# Altium PCB MiniMax 4bit.pcbdoc (part 1 of 3)
Units mil, origin at the board's own origin, x right, y up, seen from the top; angles counter-clockwise.
Board outline 6151.56 x 5816.92 mil, 2 copper layers (Top Layer, Bottom Layer); 181 components, 187 nets, 727 pads, 463 vias.
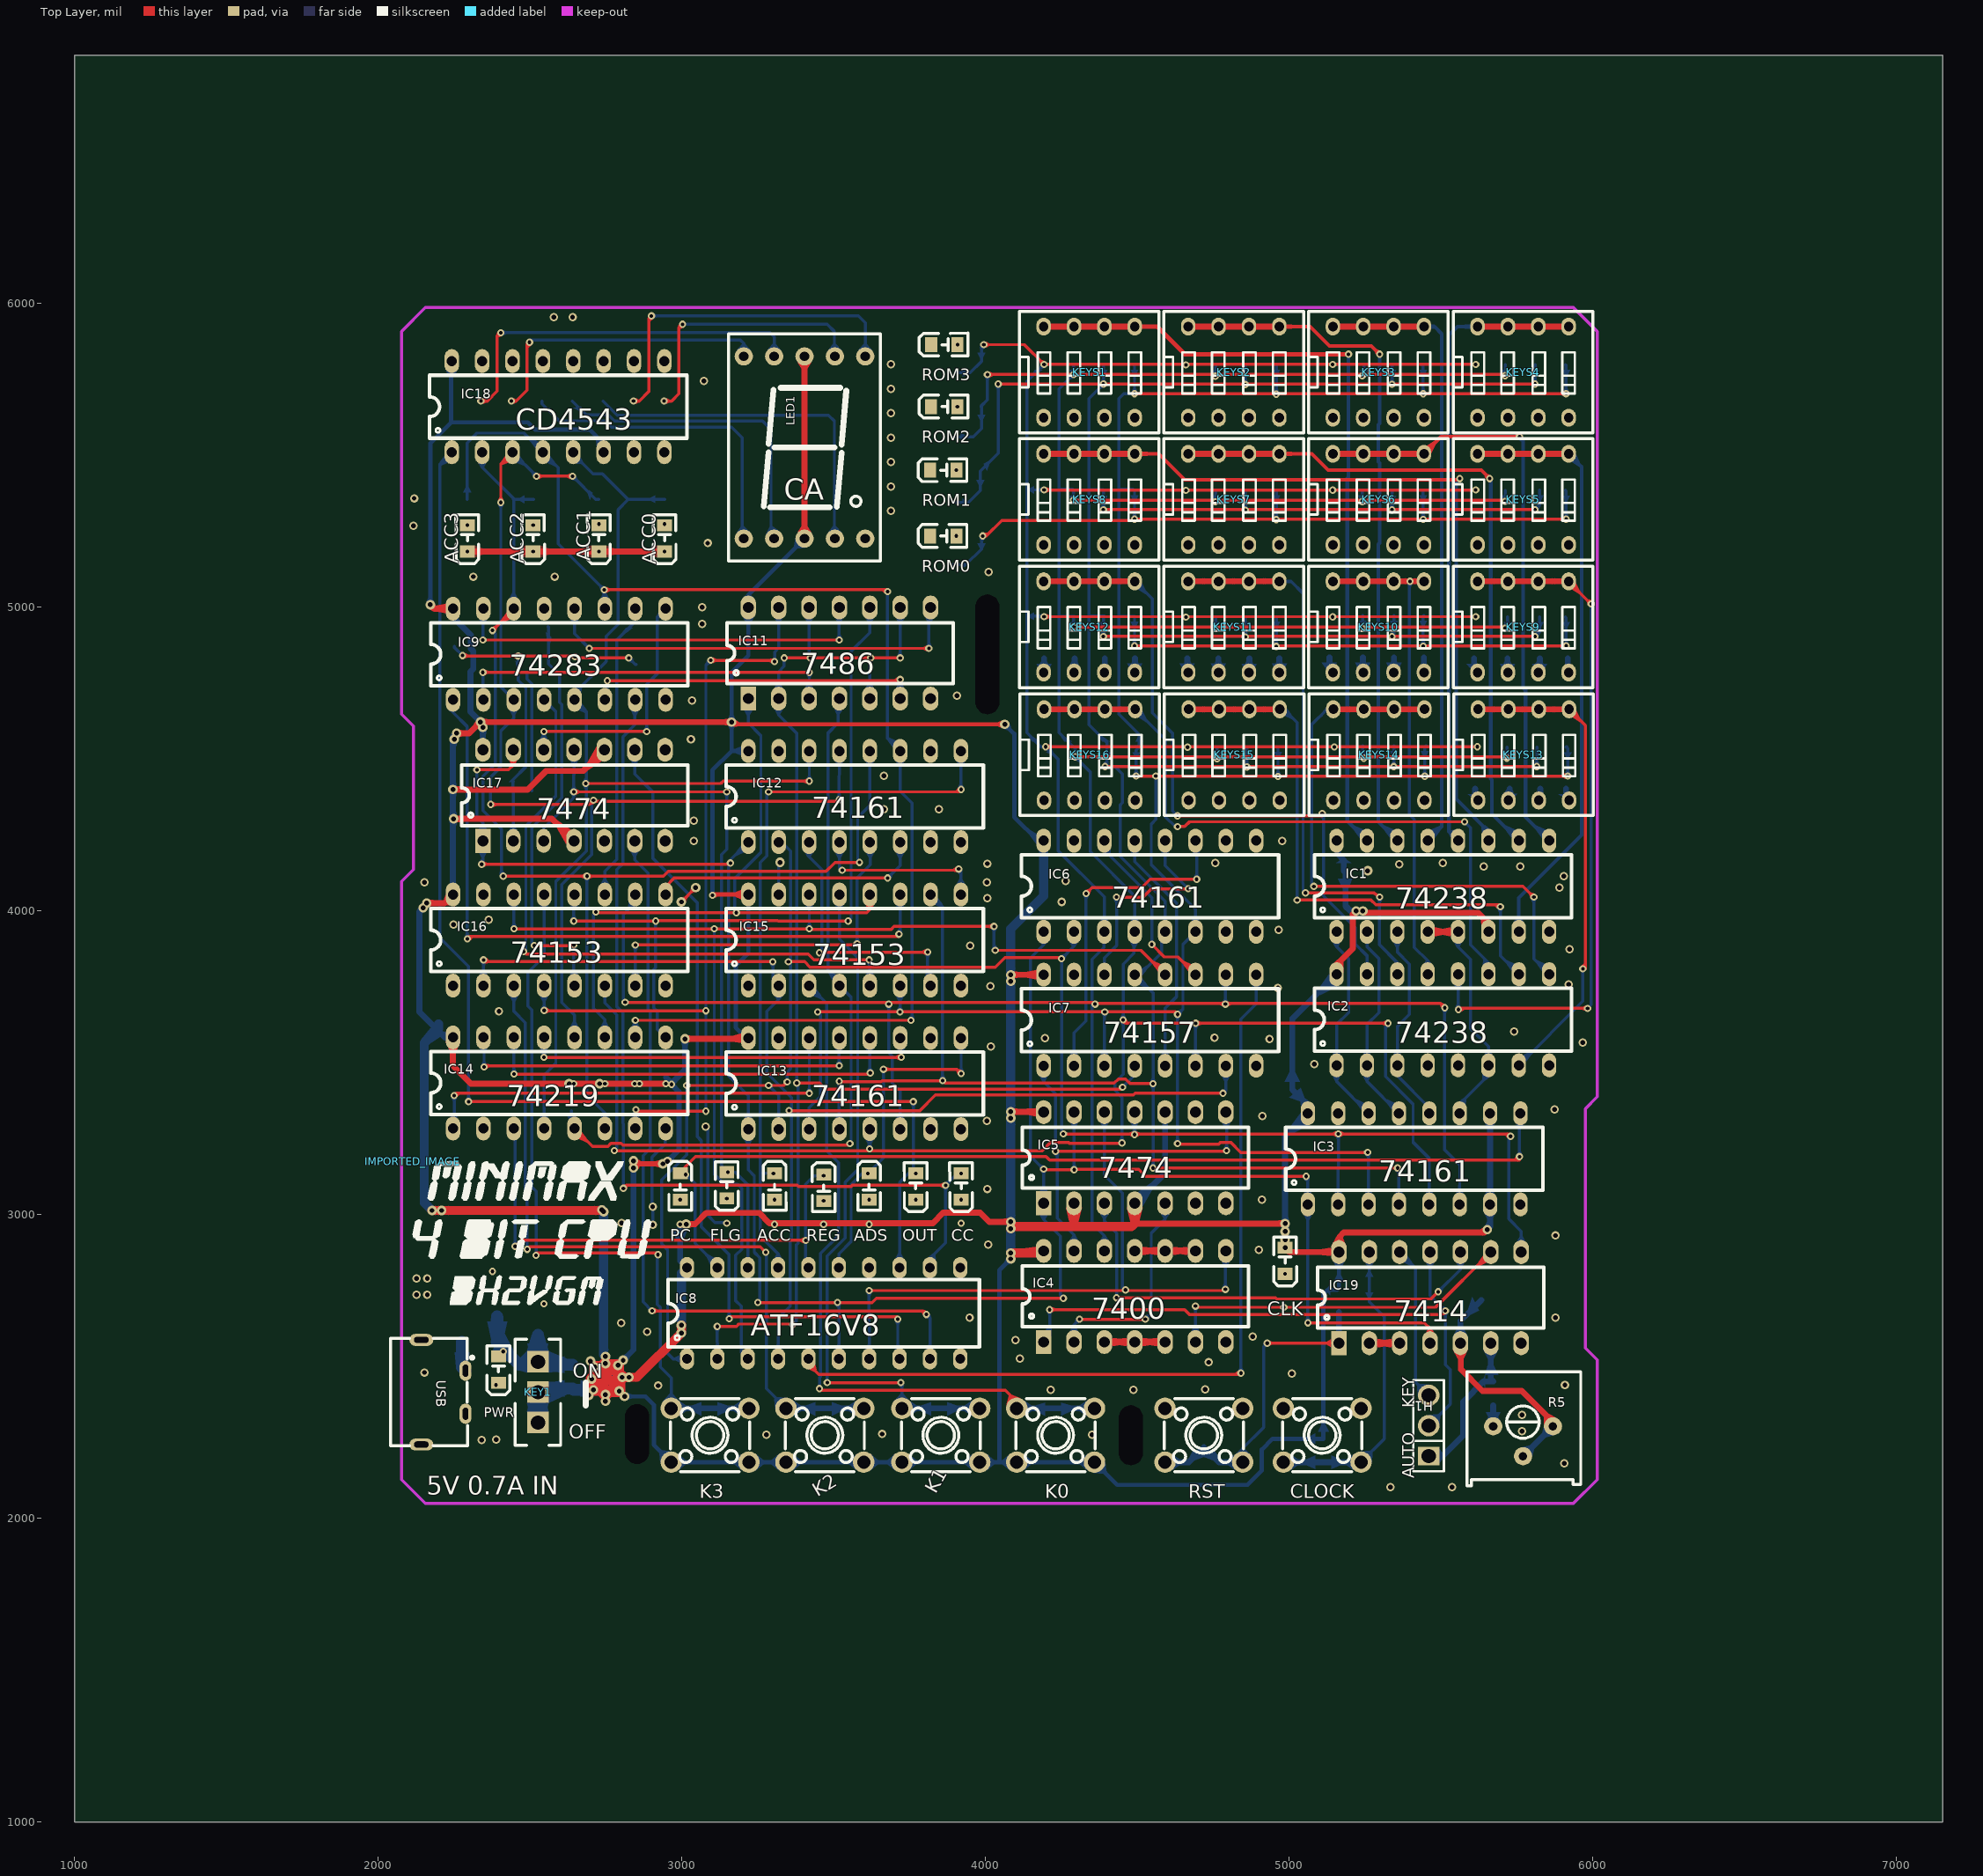
[diagram p0: Top Layer view]
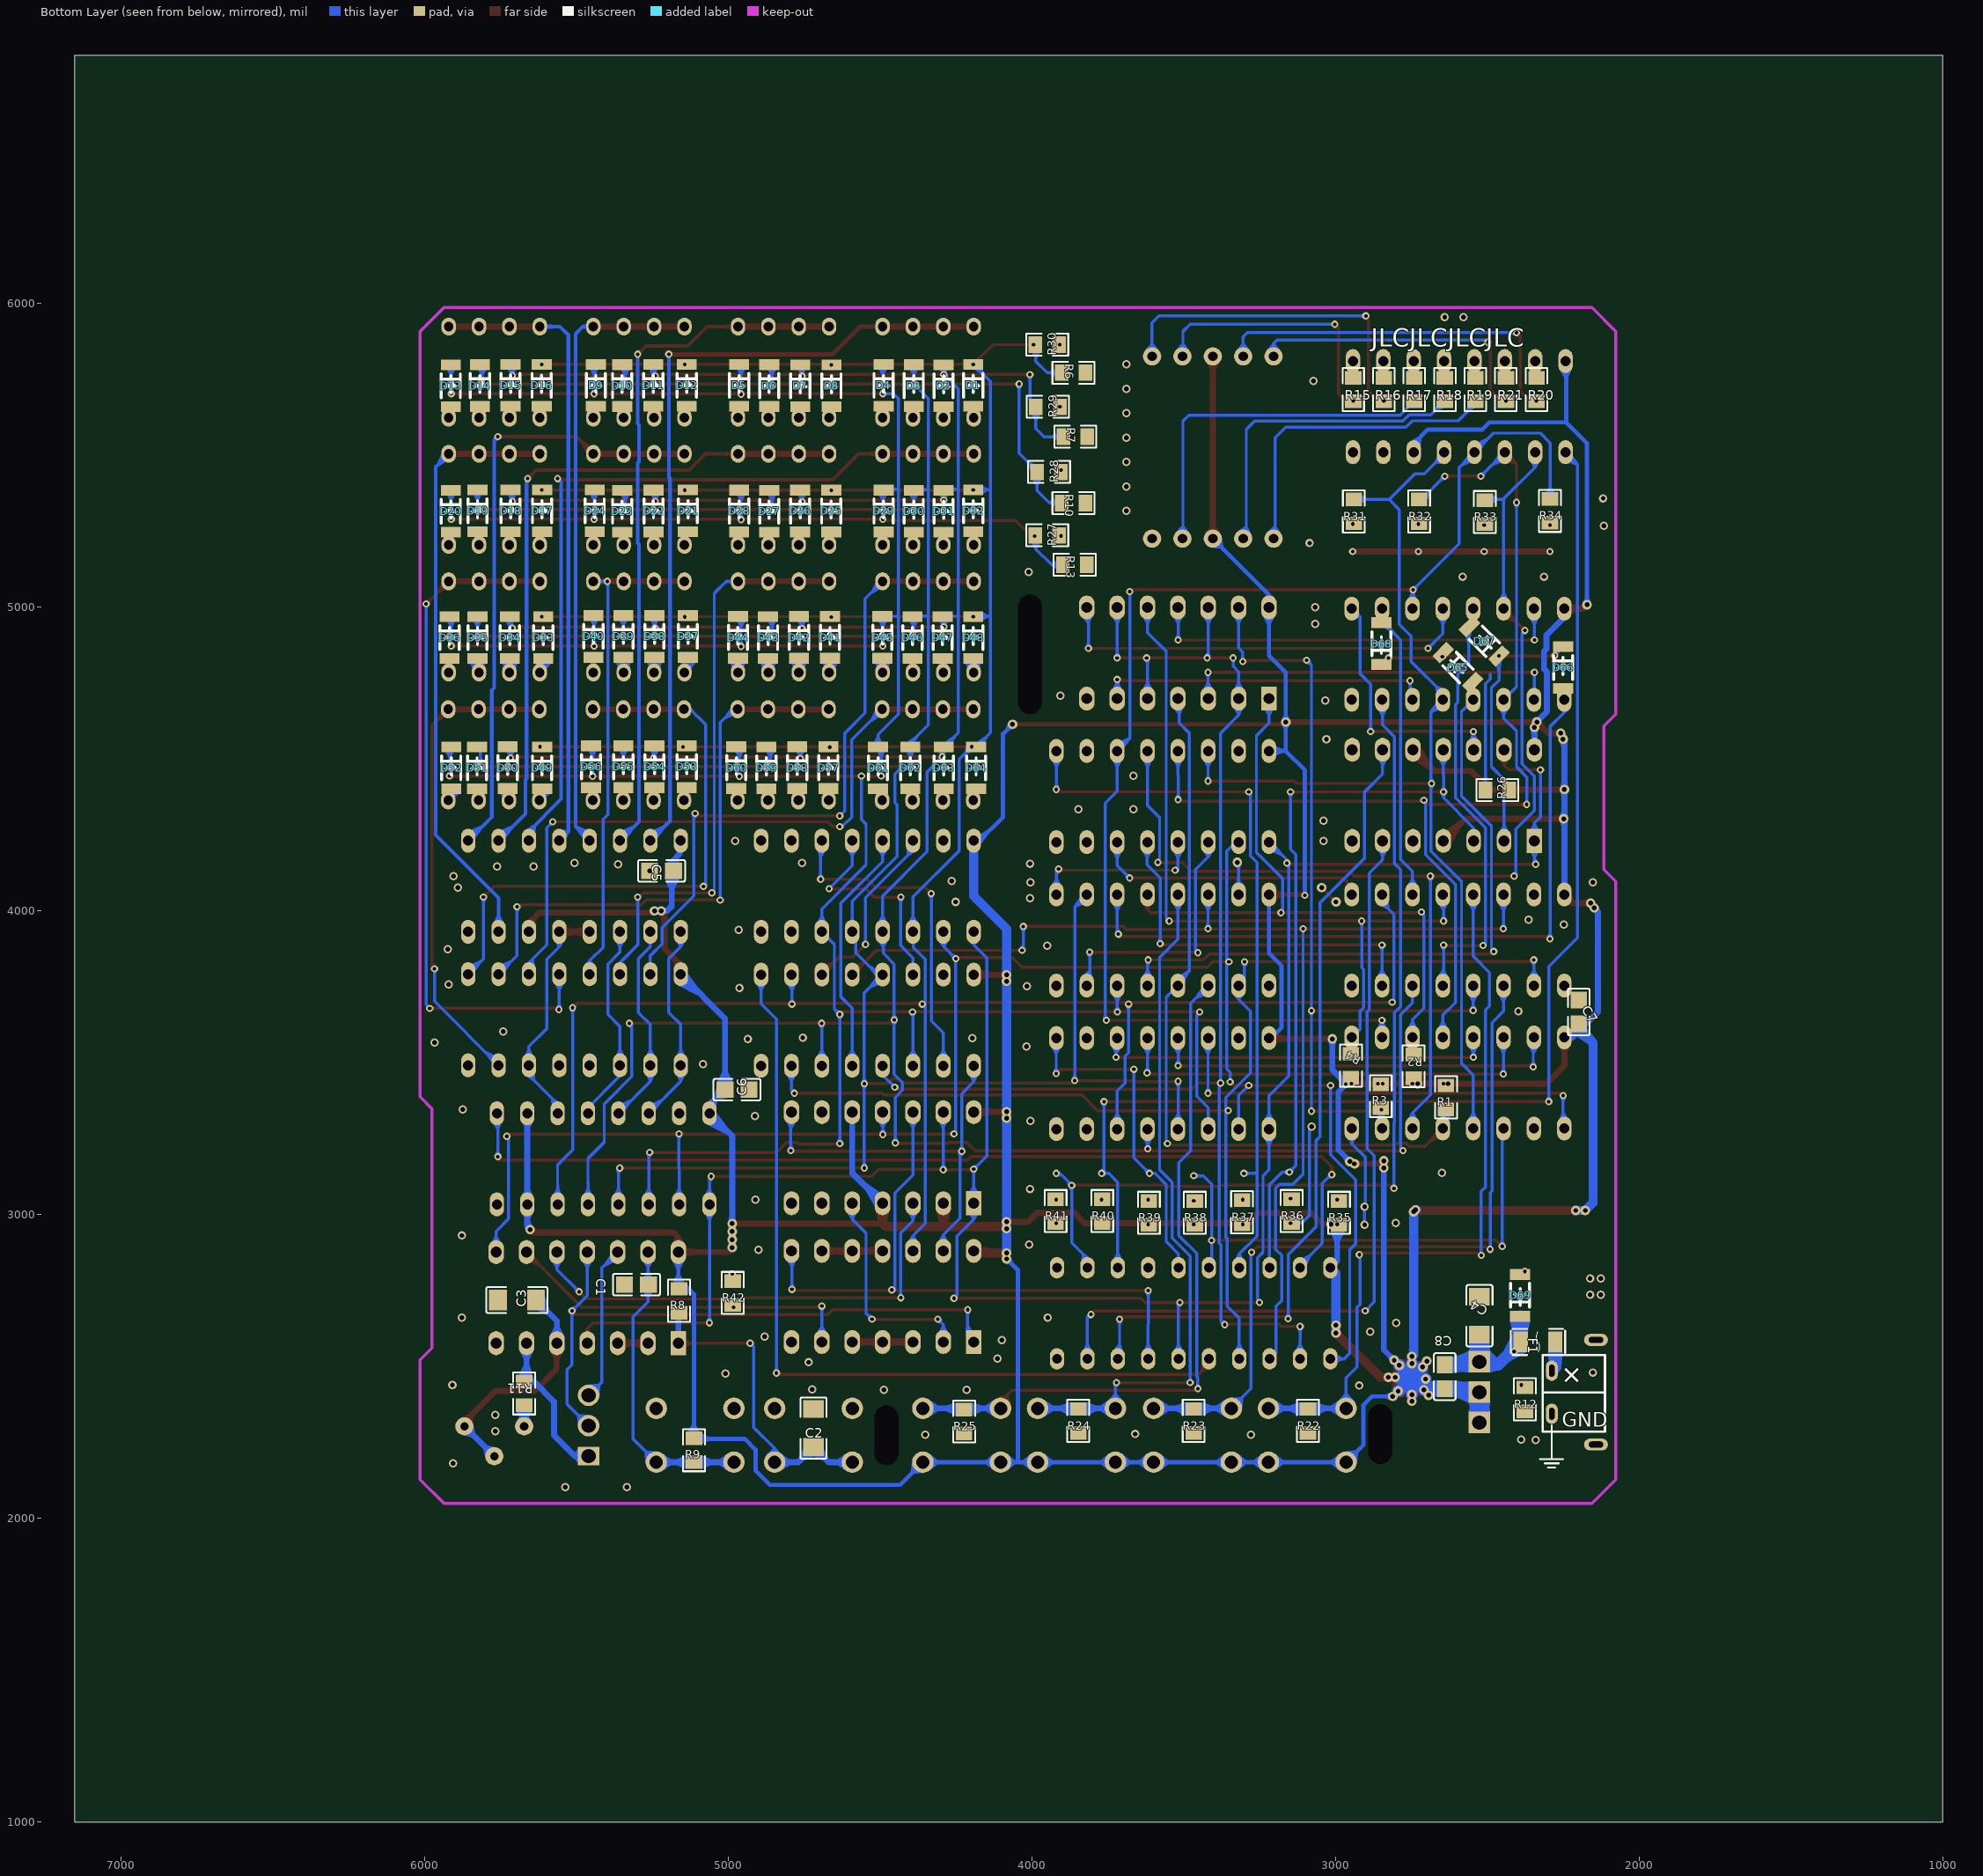
[diagram p1: Bottom Layer view, seen from below]

## Layer stack, top to bottom
Top Layer: signal copper (thickness not stored)
Dielectric: dielectric 12.6, FR-4, Dk 4.8
Bottom Layer: signal copper (thickness not stored)

## Board outline
7151.56,1000 1000,1000 1000,6816.92 7151.56,6816.92
cut-out: 4045.27,5001.96 4045.27,4687 cw(c4005.9,4687) 3966.53,4687 3966.53,5001.96 cw(c4005.9,5001.96) 4045.27,5001.96
cut-out: 4517.71,2332.68 4517.71,2214.57 cw(c4478.34,2214.57) 4438.97,2214.57 4438.97,2332.68 cw(c4478.34,2332.68) 4517.71,2332.68
cut-out: 2891.73,2336.61 2891.73,2218.5 cw(c2852.36,2218.5) 2812.99,2218.5 2812.99,2336.61 cw(c2852.36,2336.61) 2891.73,2336.61

## Components (designator, comment, footprint, x,y, rotation, side; value= is the part's Value field where it differs from the comment)
ACC "ROM0" LED0805-RD 3305.11,3092.52 r270 top
ACC0 "ROM0" LED0805-RD 2942.91,5226.37 r90 top
ACC1 "ROM0" LED0805-RD 2726.38,5226.37 r90 top
ACC2 "ROM0" LED0805-RD 2509.84,5226.37 r90 top
ACC3 "ROM0" LED0805-RD 2293.3,5226.37 r90 top
ADS "ROM0" LED0805-RD 3616.14,3092.52 r270 top
C1 "104" C0805 5301.17,2769.68 r180 bottom
C2 "10uF" C1206 4718.5,2297.24 r90 bottom
C3 "10uF" C1206 5694.87,2718.5 r0 bottom
C4 "10uF" C1206 2525.59,2667.32 r270 bottom
C5 "104" C0805 5218.5,4131.89 r180 bottom
C6 "104" C0805 4970.47,3411.41 r0 bottom
C7 "104" C0805 2198.82,3667.32 r270 bottom
C8 "104" C0805 2639.76,2466.53 r270 bottom
CC "ROM0" LED0805-RD 3919.29,3092.52 r90 top
CLK "CLK" LED0805-RD 4986.2,2848.41 r90 top
CLOCK "K4-6×6_TH" KEY-TH_4P-L6.0-W6.0-P4.50-LS6.5 5108.26,2273.62 r0 top
D1 "LL4148SG" LL-34_L3.5-W1.5-LS3.5-FD 4192.39,5730.28 r270 bottom
D2 "LL4148SG" LL-34_L3.5-W1.5-LS3.5-FD 4290.03,5728.88 r270 bottom
D3 "LL4148SG" LL-34_L3.5-W1.5-LS3.5-FD 4388.34,5729.21 r270 bottom
D4 "LL4148SG" LL-34_L3.5-W1.5-LS3.5-FD 4487.67,5729.73 r270 bottom
D5 "LL4148SG" LL-34_L3.5-W1.5-LS3.5-FD 4963.3,5729.73 r270 bottom
D6 "LL4148SG" LL-34_L3.5-W1.5-LS3.5-FD 4864.18,5729.21 r270 bottom
D7 "LL4148SG" LL-34_L3.5-W1.5-LS3.5-FD 4761.73,5728.72 r270 bottom
D8 "LL4148SG" LL-34_L3.5-W1.5-LS3.5-FD 4659.36,5728.72 r270 bottom
D9 "LL4148SG" LL-34_L3.5-W1.5-LS3.5-FD 5435.03,5730.31 r270 bottom
D10 "LL4148SG" LL-34_L3.5-W1.5-LS3.5-FD 5348.43,5729.21 r270 bottom
D11 "LL4148SG" LL-34_L3.5-W1.5-LS3.5-FD 5246.06,5730.31 r270 bottom
D12 "LL4148SG" LL-34_L3.5-W1.5-LS3.5-FD 5135.82,5730.31 r270 bottom
D13 "LL4148SG" LL-34_L3.5-W1.5-LS3.5-FD 5912.86,5728.88 r270 bottom
D14 "LL4148SG" LL-34_L3.5-W1.5-LS3.5-FD 5816.93,5729.21 r270 bottom
D15 "LL4148SG" LL-34_L3.5-W1.5-LS3.5-FD 5716.01,5730.28 r270 bottom
D16 "LL4148SG" LL-34_L3.5-W1.5-LS3.5-FD 5613.65,5730.28 r270 bottom
D17 "LL4148SG" LL-34_L3.5-W1.5-LS3.5-FD 5612.2,5316.92 r270 bottom
D18 "LL4148SG" LL-34_L3.5-W1.5-LS3.5-FD 5716.01,5316.9 r270 bottom
D19 "LL4148SG" LL-34_L3.5-W1.5-LS3.5-FD 5824.79,5316.92 r270 bottom
D20 "LL4148SG" LL-34_L3.5-W1.5-LS3.5-FD 5912.86,5315.49 r270 bottom
D21 "LL4148SG" LL-34_L3.5-W1.5-LS3.5-FD 5131.88,5316.92 r270 bottom
D22 "LL4148SG" LL-34_L3.5-W1.5-LS3.5-FD 5245.17,5316.34 r270 bottom
D23 "LL4148SG" LL-34_L3.5-W1.5-LS3.5-FD 5348.43,5315.82 r270 bottom
D24 "LL4148SG" LL-34_L3.5-W1.5-LS3.5-FD 5438.97,5316.92 r270 bottom
D25 "LL4148SG" LL-34_L3.5-W1.5-LS3.5-FD 4660.15,5316.34 r270 bottom
D26 "LL4148SG" LL-34_L3.5-W1.5-LS3.5-FD 4762.51,5316.34 r270 bottom
D27 "LL4148SG" LL-34_L3.5-W1.5-LS3.5-FD 4864.18,5315.82 r270 bottom
D28 "LL4148SG" LL-34_L3.5-W1.5-LS3.5-FD 4963.3,5316.34 r270 bottom
D29 "LL4148SG" LL-34_L3.5-W1.5-LS3.5-FD 4487.67,5316.34 r270 bottom
D30 "LL4148SG" LL-34_L3.5-W1.5-LS3.5-FD 4388.34,5315.82 r270 bottom
D31 "LL4148SG" LL-34_L3.5-W1.5-LS3.5-FD 4290.03,5315.49 r270 bottom
D32 "LL4148SG" LL-34_L3.5-W1.5-LS3.5-FD 4192.39,5316.9 r270 bottom
D33 "LL4148SG" LL-34_L3.5-W1.5-LS3.5-FD 5608.26,4899.6 r270 bottom
D34 "LL4148SG" LL-34_L3.5-W1.5-LS3.5-FD 5718.49,4899.6 r270 bottom
D35 "LL4148SG" LL-34_L3.5-W1.5-LS3.5-FD 5824.79,4899.6 r270 bottom
D36 "LL4148SG" LL-34_L3.5-W1.5-LS3.5-FD 5916.8,4899.57 r270 bottom
D37 "LL4148SG" LL-34_L3.5-W1.5-LS3.5-FD 5131.88,4903.54 r270 bottom
D38 "LL4148SG" LL-34_L3.5-W1.5-LS3.5-FD 5242.12,4903.54 r270 bottom
D39 "LL4148SG" LL-34_L3.5-W1.5-LS3.5-FD 5344.48,4903.54 r270 bottom
D40 "LL4148SG" LL-34_L3.5-W1.5-LS3.5-FD 5442.9,4903.54 r270 bottom
D41 "LL4148SG" LL-34_L3.5-W1.5-LS3.5-FD 4664.08,4900.42 r270 bottom
D42 "LL4148SG" LL-34_L3.5-W1.5-LS3.5-FD 4766.45,4900.42 r270 bottom
D43 "LL4148SG" LL-34_L3.5-W1.5-LS3.5-FD 4868.11,4899.9 r270 bottom
D44 "LL4148SG" LL-34_L3.5-W1.5-LS3.5-FD 4967.23,4900.42 r270 bottom
D45 "LL4148SG" LL-34_L3.5-W1.5-LS3.5-FD 4491.6,4900.42 r270 bottom
D46 "LL4148SG" LL-34_L3.5-W1.5-LS3.5-FD 4392.27,4899.9 r270 bottom
D47 "LL4148SG" LL-34_L3.5-W1.5-LS3.5-FD 4293.3,4899.6 r270 bottom
D48 "LL4148SG" LL-34_L3.5-W1.5-LS3.5-FD 4192.39,4899.57 r270 bottom
D49 "LL4148SG" LL-34_L3.5-W1.5-LS3.5-FD 5612.2,4470.47 r270 bottom
D50 "LL4148SG" LL-34_L3.5-W1.5-LS3.5-FD 5725.34,4471.42 r270 bottom
D51 "LL4148SG" LL-34_L3.5-W1.5-LS3.5-FD 5826.26,4470.9 r270 bottom
D52 "LL4148SG" LL-34_L3.5-W1.5-LS3.5-FD 5911.41,4470.47 r270 bottom
D53 "LL4148SG" LL-34_L3.5-W1.5-LS3.5-FD 5135.82,4474.4 r270 bottom
D54 "LL4148SG" LL-34_L3.5-W1.5-LS3.5-FD 5242.12,4474.4 r270 bottom
D55 "LL4148SG" LL-34_L3.5-W1.5-LS3.5-FD 5344.48,4474.4 r270 bottom
D56 "LL4148SG" LL-34_L3.5-W1.5-LS3.5-FD 5450.78,4474.4 r270 bottom
D57 "LL4148SG" LL-34_L3.5-W1.5-LS3.5-FD 4669.47,4471.42 r270 bottom
D58 "LL4148SG" LL-34_L3.5-W1.5-LS3.5-FD 4771.84,4471.42 r270 bottom
D59 "LL4148SG" LL-34_L3.5-W1.5-LS3.5-FD 4873.5,4470.9 r270 bottom
D60 "LL4148SG" LL-34_L3.5-W1.5-LS3.5-FD 4972.62,4471.42 r270 bottom
D61 "LL4148SG" LL-34_L3.5-W1.5-LS3.5-FD 4505.9,4470.47 r270 bottom
D62 "LL4148SG" LL-34_L3.5-W1.5-LS3.5-FD 4399.6,4470.47 r270 bottom
D63 "LL4148SG" LL-34_L3.5-W1.5-LS3.5-FD 4289.36,4470.47 r270 bottom
D64 "LL4148SG" LL-34_L3.5-W1.5-LS3.5-FD 4183.06,4470.47 r270 bottom
D65 "LL4148SG" LL-34_L3.5-W1.5-LS3.5-FD 2596.45,4801.18 r225 bottom
D66 "LL4148SG" LL-34_L3.5-W1.5-LS3.5-FD 2250,4801.18 r270 bottom
D67 "LL4148SG" LL-34_L3.5-W1.5-LS3.5-FD 2509.84,4887.79 r45 bottom
D68 "LL4148SG" LL-34_L3.5-W1.5-LS3.5-FD 2848.42,4879.91 r90 bottom
D69 "LL4148SG" LL-34_L3.5-W1.5-LS3.5-FD 2391.73,2734.25 r90 bottom
F1 "0.5A" F1206 2332.68,2580.71 r180 bottom
FLG "ROM0" LED0805-RD 3147.63,3096.45 r90 top
H1 "排针V2_2.54_1X3" HDR-TH_3P-P2.54-V-M-1 5458.65,2305.12 r90 top
IC1 "74238/74LS238/74HC238" PDIP-16 5155.5,3931.1 r0 top
IC2 "74238/74LS238/74HC238" PDIP-16 5155.5,3491.28 r0 top
IC3 "74161/74LS161/74HC161" PDIP-16 5061.02,3033.46 r0 top
IC4 "7400/74LS00/74HC00" DIP-14N#1 4190.94,2580.71 r0 top
IC5 "7474/74LS74/74HC74" DIP-14N#1 4190.94,3037.4 r0 top
IC6 "74161/74LS161/74HC161" PDIP-16 4190.94,3931.1 r0 top
IC7 "74157/74LS157/74HC157" PDIP-16 4190.94,3490.15 r0 top
IC8 "ATF16V8B" PDIP-20 3466.53,2675.2 r0 top
IC9 "74283/74LS283/74HC283" PDIP-16 2246.06,4694.88 r0 top
IC11 "7486/74LS86/74HC86" DIP-14N#1 3218.5,4698.81 r0 top
IC12 "74161/74LS161/74HC161" PDIP-16 3218.5,4226.37 r0 top
IC13 "74161/74LS161/74HC161" PDIP-16 3218.5,3281.49 r0 top
IC14 "74LS219" PDIP-16 2246.06,3283.46 r0 top
IC15 "74153/74LS153/74HC153" PDIP-16 3218.5,3753.93 r0 top
IC16 "74153/74LS153/74HC153" PDIP-16 2246.06,3753.93 r0 top
IC17 "7474/74LS74/74HC74" DIP-14N#2 2344.49,4230.31 r0 top
IC18 "CD4543" PDIP-16 2242.12,5509.84 r0 top
IC19 "7414/74LS14/74HC14" DIP-14N#1 5163.38,2576.77 r0 top
IMPORTED_IMAGE "IMPORTED_IMAGE" IMPORTED_IMAGE 2112.42,3175.19 r0 top
K0 "K4-6×6_TH" KEY-TH_4P-L6.0-W6.0-P4.50-LS6.5 4230.31,2273.62 r0 top
K1 "K4-6×6_TH" KEY-TH_4P-L6.0-W6.0-P4.50-LS6.5 3852.36,2273.62 r0 top
K2 "K4-6×6_TH" KEY-TH_4P-L6.0-W6.0-P4.50-LS6.5 3470.47,2273.62 r0 top
K3 "K4-6×6_TH" KEY-TH_4P-L6.0-W6.0-P4.50-LS6.5 3092.52,2273.62 r0 top
KEY1 "拨动开关2.54*3直插" 拨动开关-2.54*3 2525.59,2415.35 r0 top
KEYS1 "2.54 插件4位拨码开关" "2.54 插件4位拨码开关" 4341.08,5773.61 r0 top
KEYS2 "2.54 插件4位拨码开关" "2.54 插件4位拨码开关" 4816.92,5773.61 r0 top
KEYS3 "2.54 插件4位拨码开关" "2.54 插件4位拨码开关" 5293.3,5773.61 r0 top
KEYS4 "2.54 插件4位拨码开关" "2.54 插件4位拨码开关" 5769.68,5773.61 r0 top
KEYS5 "2.54 插件4位拨码开关" "2.54 插件4位拨码开关" 5769.68,5354.73 r0 top
KEYS6 "2.54 插件4位拨码开关" "2.54 插件4位拨码开关" 5293.3,5354.73 r0 top
KEYS7 "2.54 插件4位拨码开关" "2.54 插件4位拨码开关" 4816.92,5354.73 r0 top
KEYS8 "2.54 插件4位拨码开关" "2.54 插件4位拨码开关" 4341.08,5354.73 r0 top
KEYS9 "2.54 插件4位拨码开关" "2.54 插件4位拨码开关" 5769.68,4934.87 r0 top
KEYS10 "2.54 插件4位拨码开关" "2.54 插件4位拨码开关" 5293.3,4934.87 r0 top
KEYS11 "2.54 插件4位拨码开关" "2.54 插件4位拨码开关" 4816.92,4934.87 r0 top
KEYS12 "2.54 插件4位拨码开关" "2.54 插件4位拨码开关" 4341.08,4934.87 r0 top
KEYS13 "2.54 插件4位拨码开关" "2.54 插件4位拨码开关" 5771.13,4513.75 r0 top
KEYS14 "2.54 插件4位拨码开关" "2.54 插件4位拨码开关" 5294.75,4513.75 r0 top
KEYS15 "2.54 插件4位拨码开关" "2.54 插件4位拨码开关" 4818.38,4513.75 r0 top
KEYS16 "2.54 插件4位拨码开关" "2.54 插件4位拨码开关" 4342.53,4513.75 r0 top
LED1 "SM420561N" LED-SEG-TH_10P-L12.7-W19.0-P2.54-S15.24-BL 3403.54,5525.58 r0 top
OUT "ROM0" LED0805-RD 3769.68,3092.52 r90 top
PC "ROM0" LED0805-RD 2994.09,3092.52 r270 top
PWR "PWR" LED0805-RD 2395.63,2490.16 r90 top
R1 "4.7K" R0805#1 2635.82,3385.82 r270 bottom
R2 "4.7K" R0805#1 2742.12,3488.19 r90 bottom
R3 "4.7K" R0805#1 2850.39,3389.76 r270 bottom
R4 "4.7K" R0805#1 2948.82,3490.15 r90 bottom
R5 "3386-100k" RES-ADJ-TH_3386P 5769.68,2253.94 r180 top
R6 "4.7K" R0805#1 3862.2,5771.65 r0 bottom
R7 "4.7K" R0805#1 3856.29,5561.02 r0 bottom
R8 "4.7K" R0805#1 5161.41,2716.53 r270 bottom
R9 "4.7K" R0805#1 5112.2,2224.41 r270 bottom
R10 "4.7K" R0805#1 3862.2,5342.51 r0 bottom
R11 "1kΩ" R0805#1 5671.25,2411.42 r270 bottom
R12 "4.7K" R0805#1 2375.98,2391.73 r270 bottom
R13 "4.7K" R0805#1 3858.26,5139.76 r0 bottom
R15 "4.7k" R0805#2 2941.08,5716.39 r90 bottom
R16 "4.7k" R0805#2 2840.55,5716.39 r90 bottom
R17 "4.7k" R0805#2 2740.03,5716.39 r90 bottom
R18 "4.7k" R0805#2 2639.51,5716.39 r90 bottom
R19 "4.7k" R0805#2 2538.98,5716.39 r90 bottom
R20 "4.7k" R0805#2 2337.93,5716.39 r90 bottom
R21 "4.7k" R0805#2 2438.46,5716.39 r90 bottom
R22 "4.7K" R0805#1 3090.55,2320.86 r270 bottom
R23 "4.7K" R0805#1 3466.53,2320.86 r270 bottom
R24 "4.7K" R0805#1 3846.45,2320.86 r270 bottom
R25 "4.7K" R0805#1 4222.44,2318.9 r270 bottom
R26 "4.7K" R0805#1 2466.53,4397.63 r180 bottom
R27 "4.7K" R0805#1 3948.81,5236.21 r180 bottom
R28 "4.7K" R0805#1 3942.91,5444.87 r180 bottom
R29 "4.7K" R0805#1 3946.84,5659.44 r180 bottom
R30 "4.7K" R0805#1 3948.81,5864.16 r180 bottom
R31 "4.7K" R0805#1 2938.97,5314.95 r270 bottom
R32 "4.7K" R0805#1 2724.41,5314.95 r270 bottom
R33 "4.7K" R0805#1 2507.87,5312.98 r270 bottom
R34 "4.7K" R0805#1 2293.3,5316.92 r270 bottom
R35 "4.7K" R0805#1 2988.19,3005.9 r270 bottom
R36 "4.7K" R0805#1 3143.7,3011.81 r270 bottom
R37 "4.7K" R0805#1 3307.08,3007.87 r270 bottom
R38 "4.7K" R0805#1 3462.59,3005.9 r270 bottom
R39 "4.7K" R0805#1 3614.17,3005.9 r270 bottom
R40 "4.7K" R0805#1 3767.71,3011.81 r270 bottom
R41 "4.7K" R0805#1 3921.26,3011.81 r270 bottom
R42 "4.7K" R0805#1 4984.24,2742.12 r270 bottom
REG "ROM0" LED0805-RD 3466.53,3088.58 r270 top
ROM0 "ROM0" LED0805-RD 3860.23,5234.24 r0 top
ROM1 "ROM0" LED0805-RD 3860.23,5450.78 r0 top
ROM2 "ROM0" LED0805-RD 3863.82,5660.26 r0 top
ROM3 "ROM0" LED0805-RD 3864.17,5864.16 r0 top
RST "K4-6×6_TH" KEY-TH_4P-L6.0-W6.0-P4.50-LS6.5 4718.5,2273.62 r0 top
USB "KH-TYPE-C-2P" USB-SMD_KH-TYPE-C-2P 2214.57,2415.35 r270 top

## Footprints (in the part's own frame and the unit in brackets; to place one, negate y for a bottom-side part, rotate by r counter-clockwise, add the part's x,y. Pads: shape width x height; smd on the part's side, far side on the other; paste and mask are expansions set on the pad)
"2.54 插件4位拨码开关" [mm]
  oval 1.2x1.5 hole 0.8: 1(-3.81,-3.81) 2(-1.27,-3.81) 3(1.27,-3.81) 4(3.81,-3.81) 5(3.81,3.81) 6(1.27,3.81) 7(-1.27,3.81) 8(-3.81,3.81)
  silkscreen extent -5.84,-5.08 5.84,5.08
C0805 [mm]
  rect 1.41x1.35 smd: 1(1,0) 2(-1,0)
  silkscreen extent -1.96,-0.9 1.96,0.9
C1206 [mm]
  rect 1.485x1.728 smd: 1(1.593,0) 2(-1.593,0)
  silkscreen extent -2.56,-1.09 2.56,1.09
DIP-14N#1 [mm]
  rect 1.3x2 hole 0.9: 1(0,0)
  oval 1.3x2 hole 0.9: 2(2.54,0) 3(5.08,0) 4(7.62,0) 5(10.16,0) 6(12.7,0) 7(15.24,0) 8(15.24,7.62) 9(12.7,7.62) 10(10.16,7.62) 11(7.62,7.62) 12(5.08,7.62) 13(2.54,7.62) 14(0,7.62)
  silkscreen extent -1.78,1.27 17.14,6.35
DIP-14N#2 [mm]
  rect 1.3x2 hole 0.9: 1(0,0)
  oval 1.2x2 hole 0.9: 2(2.54,0) 3(5.08,0)
  oval 1.3x2 hole 0.9: 4(7.62,0) 5(10.16,0) 6(12.7,0) 7(15.24,0) 8(15.24,7.62) 9(12.7,7.62) 10(10.16,7.62) 11(7.62,7.62) 12(5.08,7.62) 13(2.54,7.62) 14(0,7.62)
  silkscreen extent -1.78,1.27 17.14,6.35
F1206 [mil]
  rect 46.85x68.03 smd: 1(56.89,0) 2(-56.89,0)
  silkscreen extent -89,-43 89,43
HDR-TH_3P-P2.54-V-M-1 [mm]
  rect 1.575x1.8 hole 1.2: 1(-2.54,0)
  round 1.8 hole 1.2: 2(0,0) 3(2.54,0)
  silkscreen extent -3.81,-1.27 3.81,1.27
IMPORTED_IMAGE [mil]
  silkscreen extent 0,-472 787,0
KEY-TH_4P-L6.0-W6.0-P4.50-LS6.5 [mm]
  round 1.8 hole 1.1: 1(-3.251,-2.25) 2(3.251,-2.25) 3(3.251,2.25) 4(-3.251,2.25)
  silkscreen extent -3.3,-3.05 3.3,3.05
LED0805-RD [mm]
  rect 1x1.25 smd: 1(-1.1,0) 2(1.1,0)
  silkscreen extent -2.1,-0.95 1.98,0.96
LED-SEG-TH_10P-L12.7-W19.0-P2.54-S15.24-BL [mil]
  round 60 hole 31.5: 1(-200,-300) 2(-100,-300) 3(0,-300) 4(100,-300) 5(200,-300) 6(200,300) 7(100,300) 8(0,300) 9(-100,300) 10(-200,300)
  silkscreen extent -250,-374 250,374
LL-34_L3.5-W1.5-LS3.5-FD [mm]
  rect 0.9x1.676 smd: 1(1.75,0) 2(-1.75,0)
  silkscreen extent -1,-0.8 1,0.8
PDIP-16 [mm]
  oval 1.2x2 hole 0.85: 1(0,0) 2(2.54,0) 3(5.08,0) 4(7.62,0) 5(10.16,0) 6(12.7,0) 7(15.24,0) 8(17.78,0) 9(17.78,7.62) 10(15.24,7.62) 11(12.7,7.62) 12(10.16,7.62) 13(7.62,7.62) 14(5.08,7.62) 15(2.54,7.62) 16(0,7.62)
  silkscreen extent -1.85,1.18 19.66,6.44
PDIP-20 [mm]
  oval 1.2x1.8 hole 0.8: 1(-11.43,-3.81) 2(-8.89,-3.81) 3(-6.35,-3.81) 4(-3.81,-3.81) 5(-1.27,-3.81) 6(1.27,-3.81) 7(3.81,-3.81) 8(6.35,-3.81) 9(8.89,-3.81) 10(11.43,-3.81) 11(11.43,3.81) 12(8.89,3.81) 13(6.35,3.81) 14(3.81,3.81) 15(1.27,3.81) 16(-1.27,3.81) 17(-3.81,3.81) 18(-6.35,3.81) 19(-8.89,3.81) 20(-11.43,3.81)
  silkscreen extent -13.03,-2.83 13.03,2.83
R0805#1 [mil]
  rect 44.59x54.21 smd: 1(39.37,0) 2(-39.37,0)
  silkscreen extent -69,-36 69,36
R0805#2 [mil]
  rect 44.59x54.21 smd: 1(38.04,0) 2(-38.04,0)
  silkscreen extent -71,-35 71,35
RES-ADJ-TH_3386P [mil]
  round 60 hole 27.56: 1(98.43,-49.21) 2(0.01,49.22) 3(-98.42,-49.21)
  silkscreen extent -190,-228 185,147
USB-SMD_KH-TYPE-C-2P [mm]
  oval 1.7x1 hole 0.45 slot 1 at 0 deg: 1(-1.8,1.85) 2(1.8,1.85)
  oval 1x2 hole 0.5 slot 1.2 at 90 deg: 3(4.375,-1.85) 4(-4.375,-1.85)
  silkscreen extent -4.5,-4.41 4.46,2.53
拨动开关-2.54*3 [mm]
  rect 1.8x1.8 hole 1.2: 1(0,2.54) 2(0,0) 3(0,-2.54)
  silkscreen extent -1.91,-4.44 1.91,4.44

## Via types
v1: diameter 24, hole 12, Top Layer to Bottom Layer, tented both sides, 306 vias
v2: diameter 27.56, hole 15.75, Top Layer to Bottom Layer, tented both sides, 98 vias
v3: diameter 31.5, hole 15.75, Top Layer to Bottom Layer, tented both sides, 59 vias

## Nets (pads, with @x,y where several pads share a name; then routed paths per layer and width w, separated by ;. In a path a pad name is that pad's centre, name@x,y a point inside that pad or via, vN(x,y) a via of type N, cw(c..) or ccw(c..) an arc to the next point about the centre after c; other vN are vias at no path point)
A0: IC9.5 IC12.14 IC14.4 IC18.5 R31.2 | length 3440.8
  Top Layer w10: v1(2683.07,4419.28) 3127.94,4419.28 3135.82,4427.16 v1(3419.29,4427.16)
  Bottom Layer w10: IC14.4@2546.06,3283.46 2546.07,3459.41 2584.67,3498.01 2584.67,4096.41 2685.07,4196.81 2685.07,4655.91 IC9.5@2646.06,4694.88 2646.07,4716.91 2749.97,4820.81 2749.97,4903.51 2789.37,4942.91 2789.37,5320.61 2823.07,5354.81 2837.97,5354.91 ; IC18.5@2642.17,5509.81 2642.17,5503.51 2706.67,5439.01 2738.17,5439.01 2822.17,5354.91 R31.2@2942.87,5354.91 ; IC12.14@3418.5,4526.37 3419.27,4525.61 v1@3419.27,4427.11
A1: IC9.3 IC12.13 IC14.12 IC18.3 R32.2 | length 3731.7
  Top Layer w10: v1(2370.08,4350.39) 2694.85,4350.39 v1(2708.67,4364.21) 2712.67,4360.21 3511.77,4360.21 v1(3517.67,4366.11) ; v1@2403.57,5344.51 2403.57,5471.21 IC18.3@2442.17,5509.81 ; v1(2520.88,5431.09) v1(2639.76,5431.09)
  Bottom Layer w10: v1(2370.08,4350.39) 2370.07,4440.91 2403.57,4474.41 2403.57,4592.51 2446.07,4635.01 IC9.3@2446.06,4694.88 2403.57,4737.41 v1@2403.57,5344.51 ; IC18.3@2442.17,5509.81 v1(2520.88,5431.09) ; v1(2639.76,5431.09) 2715.87,5354.91 R32.2@2726.37,5354.91 ; IC14.12@2646.06,3583.46 2646.07,3657.11 2604.37,3698.81 2604.37,4086.61 2702.77,4185.01 2702.77,4358.31 v1(2708.67,4364.21) ; v1(3517.67,4366.11) IC12.13@3518.5,4526.37
  other v1: 2403.54,5344.48
A2: IC9.14 IC12.12 IC14.6 IC18.2 R33.2 | length 4021.1
  Top Layer w10: v1(2375.97,4923.21) 2446.07,4993.31 IC9.14@2446.06,4994.88 ; v1(2411.42,4114.17) v1(2687.01,4114.17) ; v1(2687.01,4114.17) 2938.97,4114.21 2954.67,4129.91 3474.37,4129.91 3503.97,4159.41 v1@3584.67,4159.41
  Bottom Layer w10: IC18.2@2342.17,5509.81 2342.17,5461.01 2448.37,5354.71 R33.2@2511.77,5354.71 ; v1(2375.97,4923.21) 2385.87,4913.41 2385.87,4484.21 2344.47,4442.91 2344.47,4330.71 2405.47,4269.71 2405.47,4114.21 v1(2411.42,4114.17) ; 2444.77,5358.21 2446.07,5348.41 IC9.14@2446.06,4994.88 ; v1(2687.01,4114.17) 2686.97,3393.71 2746.07,3334.61 IC14.6@2746.06,3283.46 ; v1@3584.67,4159.41 3578.77,4165.31 3578.77,4307.11 3618.47,4346.81 IC12.12@3618.5,4526.37
  other v1: 3584.64,4159.44
A3: IC9.11 IC12.11 IC14.10 IC18.4 R34.2 | length 4420.1
  Top Layer w10: v1(2744.09,5057.08) 3559.05,5057.08 3671.26,5057.08 v1(3677.16,5051.17) ; v1@2846.45,3639.76 v1(3753.93,3639.76)
  Bottom Layer w10: R34.2@2292.77,5354.71 2292.77,5540.71 2324.77,5572.81 2479.17,5572.81 2542.17,5509.81 2592.47,5459.41 2592.47,5208.61 2746.07,5055.11 IC9.11@2746.06,4994.88 ; IC14.10@2846.06,3583.46 2846.47,3583.81 v1@2846.47,3639.71 ; v1(3677.16,5051.17) 3677.17,4567.71 IC12.11@3718.5,4526.37 3718.47,4393.71 3757.87,4354.31 3757.87,3643.71 v1@3753.97,3639.71
  other v1: 2846.45,3639.76
ACC0_2: ACC0.2 R31.1
  other v1: 2942.91,5273.61
ACC1_2: ACC1.2 R32.1
  other v1: 2726.37,5273.61
ACC2_2: ACC2.2 R33.1
  other v1: 2509.84,5269.68
ACC3_2: ACC3.2 R34.1
  other v1: 2293.3,5269.68
ACC_2: ACC.2 R37.2
  other v1: 3305.12,3049.21
ACCLD: ACC.1 IC8.17 IC12.9 | length 2456.6
  Top Layer w10: v1(3285.43,4391.72) 3911.41,4391.72 v1(3919.29,4399.6)
  Bottom Layer w10: v1@3285.47,4391.71 3279.57,4391.71 3279.57,4181.11 3257.87,4159.51 3257.87,3135.81 ; IC8.17@3316.57,2825.21 3316.57,2870.41 3257.87,2929.11 3257.87,3135.81 ; IC12.9@3918.5,4526.37 3918.47,4400.41 v1(3919.29,4399.6) ; 3257.87,3135.81 v1(3301.18,3135.82) 3257.87,3135.81
ADS_2: ADS.2 R39.2
  other v1: 3616.14,3049.21
ADSLD: ADS.1 IC8.15 IC13.9 | length 1103.2
  Top Layer w10: v1(3663.38,3478.34) 3905.51,3478.34 v1(3919.29,3464.56)
  Bottom Layer w10: IC8.15@3516.57,2825.21 3516.57,2870.91 3557.07,2911.41 3557.07,3098.41 3594.47,3135.81 v1(3612.2,3135.82) ; v1(3612.2,3135.82) 3663.38,3187 v1(3663.38,3478.34) ; IC13.9@3918.5,3581.49 3919.27,3580.71 v1@3919.27,3464.51
ALU0: D65.1 IC9.4 IC15.5 | length 2128.2
  Top Layer w10: v1@2478.37,3866.11 2486.27,3858.31 3415.37,3858.31 3435.07,3838.61 v1@3616.17,3838.61
  Bottom Layer w10: v1@2478.37,3866.11 2486.17,3866.11 2486.17,4279.51 2584.67,4378.01 2584.67,4656.31 IC9.4@2546.06,4694.88 ; v1@3616.17,3838.61 3618.47,3836.21 IC15.5@3618.5,3753.93
  other v1: 3616.14,3838.58 2478.34,3866.14
ALU1: D66.1 IC9.1 IC15.11 | length 2371.7
  Top Layer w10: v1(2293.27,3907.51) 2301.07,3915.31 3714.57,3915.31 v1(3714.56,3923.22)
  Bottom Layer w10: IC9.1@2246.06,4694.88 2246.07,4653.51 2293.27,4606.31 v1(2293.27,3907.51) ; v1(3714.56,3923.22) 3718.47,3927.11 IC15.11@3718.5,4053.93
ALU2: D67.1 IC9.13 IC16.5 | length 1384
  Top Layer w10: v1(2513.78,3885.82) 2641.73,3885.82 v1(2643.7,3887.79)
  Bottom Layer w10: v1(2513.78,3885.82) 2505.87,3885.81 2505.87,4273.61 2604.37,4372.01 2604.37,4679.11 2596.47,4687.01 2596.47,4777.51 2561.07,4813.01 2561.07,4934.01 D67.1@2558.56,4936.51 ; v1(2643.7,3887.79) 2643.67,3756.31 IC16.5@2646.06,3753.93
ALU3: D68.1 IC9.10 IC16.11 | length 940.8
  Bottom Layer w10: IC16.11@2746.06,4053.93 2746.07,4129.91 2785.47,4169.31 2785.47,4891.71 2842.47,4948.81 D68.1@2848.47,4948.81
C4: IC9.9 IC17.12 | length 829.2
  Top Layer w10: v1(2545.27,4590.54) v1(2883.85,4590.54)
  Bottom Layer w10: IC17.12@2544.49,4530.31 2545.27,4531.11 v1(2545.27,4590.54) ; v1@2883.87,4590.51 2883.87,4746.01 2919.27,4781.51 2919.27,4968.11 IC9.9@2946.06,4994.88
CC: CC.2 IC8.12 IC9.7 | length 3070.8
  Top Layer w10: v1(2807.08,3086.61) 2816.92,3096.45 3379.92,3096.45 3383.86,3092.52 3557.08,3092.52 3561.02,3096.45 3702.75,3096.45 v1(3868.11,3096.45)
  Bottom Layer w10: v1(2807.08,3086.61) 2807.17,3299.11 2805.07,3301.21 2805.07,3664.91 2785.47,3684.51 2785.47,4136.01 2805.07,4155.61 2805.07,4572.81 2844.47,4612.21 2844.47,4693.31 IC9.7@2846.06,4694.88 ; IC8.12@3816.57,2825.21 3816.57,2855.91 3868.07,2907.51 3868.07,3096.41 3907.47,3135.81 v1(3919.29,3135.82)
CC_1: CC.1 R41.2
  other v1: 3919.28,3049.2
CF: IC8.8 IC17.9 | length 2703.4
  Top Layer w10: v1(3155.51,2657.48) 3155.47,2663.41 3710.67,2663.41 v1@3710.67,2655.51
  Bottom Layer w10: IC17.9@2844.49,4530.31 2844.47,4450.81 2903.57,4391.71 2903.57,4173.21 3051.17,4025.61 3051.17,3255.91 3062.97,3244.11 3062.97,2960.61 3155.47,2868.11 v1(3155.51,2657.48) ; v1@3710.67,2655.51 3710.67,2531.11 IC8.8@3716.57,2525.21
  other v1: 3710.63,2655.51
CMD0: IC7.4 IC8.2 IC11.2 IC11.5 IC11.9 IC11.12 | length 4619.9
  Top Layer w10: v1(3116.14,2631.89) 3179.13,2631.89 3187,2639.76 3362.2,2639.76 v1(3364.17,2637.79) ; v1(3336.61,4832.67) 3422.32,4832.67 v1(3422.37,4832.71) v1(3621.37,4832.71) v1(3718.47,4832.71) ; v1(3377.95,3433.06) 3452.75,3433.06 3472.43,3413.38 4450.78,3413.38 v1(4450.78,3419.29)
  Bottom Layer w10: v1@3116.17,2631.91 IC8.2@3116.57,2525.21 ; v1(3336.61,4832.67) 3336.57,4805.11 3318.47,4787.01 IC11.2@3318.5,4698.81 3318.47,4644.11 3377.97,4584.61 v1(3377.95,3433.06) 3381.87,3429.11 3381.87,2905.51 3375.97,2899.61 3375.97,2649.61 v1(3364.17,2637.79) ; IC11.12@3418.5,4998.81 3418.47,4836.61 v1(3422.37,4832.71) ; IC11.5@3618.5,4698.81 3618.47,4829.81 v1(3621.37,4832.71) ; v1(3718.47,4832.71) IC11.9@3718.5,4998.81 ; v1(4450.78,3419.29) 4490.97,3459.41 IC7.4@4490.97,3490.11
CMD1: IC7.12 IC8.3 IC15.14 IC16.14 | length 3988
  Top Layer w10: v1(2446.87,3940.91) v1(3419.29,3940.94) 3421.27,3939.01 3688.97,3939.01 3698.77,3948.81 v1(4027.55,3948.81) ; v1(4031.49,3870.07) 4511.07,3870.11 IC7.12@4590.97,3790.11
  Bottom Layer w10: IC16.14@2446.06,4053.93 v1(2446.87,3940.91) ; v1(3106.3,3940.94) 3106.27,3133.81 3139.77,3100.41 3183.07,3100.41 3196.87,3086.61 3196.87,2885.81 3177.17,2866.11 3177.17,2716.51 3194.87,2698.81 3194.87,2546.91 IC8.3@3216.57,2525.21 ; IC15.14@3418.5,4053.93 3419.27,4053.11 v1(3419.29,3940.94) ; v1(4027.55,3948.81) 4027.55,3874.01 v1(4031.49,3870.07)
CMD2: IC7.7 IC8.4 IC15.2 IC16.2 | length 3970.2
  Top Layer w10: v1(2346.47,3838.61) 2352.41,3832.67 v1(3299.21,3832.67) ; v1(3352.36,3342.51) 3783.47,3342.51 3834.67,3393.71 4486.17,3393.71 4492.17,3399.61 v1(4781.47,3399.61)
  Bottom Layer w10: IC16.2@2346.06,3753.93 v1(2346.47,3838.61) ; v1(3299.21,3832.67) 3299.17,3773.21 IC15.2@3318.5,3753.93 3318.47,3708.21 3279.57,3669.31 3279.57,3466.51 3360.27,3385.81 3360.27,3344.51 3360.27,2925.21 3356.27,2921.21 3356.27,2698.81 3316.57,2659.01 IC8.4@3316.57,2525.21 ; v1(4781.47,3399.61) 4790.97,3409.11 IC7.7@4790.97,3490.11
CMD3: IC7.9 IC8.5 | length 2789
  Top Layer w10: IC8.5@3416.57,2525.21 3416.57,2508.61 3450.77,2474.41 4836.57,2474.41 v1@4840.57,2478.31
  Bottom Layer w10: v1@4840.57,2478.31 4840.57,3643.71 4890.97,3694.11 IC7.9@4890.97,3790.11
  other v1: 4840.54,2478.34
D5_1: D5.1 KEYS2.4
D6_1: D6.1 KEYS2.3
D7_1: D7.1 KEYS2.2
D8_1: D8.1 KEYS2.1
D9_1: D9.1 KEYS3.4
D10_1: D10.1 KEYS3.3
D11_1: D11.1 KEYS3.2
D12_1: D12.1 KEYS3.1
D13_1: D13.1 KEYS4.4
D14_1: D14.1 KEYS4.3
D15_1: D15.1 KEYS4.2
D16_1: D16.1 KEYS4.1
D29_1: D29.1 KEYS8.4
D30_1: D30.1 KEYS8.3
D31_1: D31.1 KEYS8.2
D32_1: D32.1 KEYS8.1
D45_1: D45.1 KEYS12.4 | length 46.6
  Bottom Layer w19.68: KEYS12.4@4491.08,4784.87 D45.1@4491.6,4831.52
D46_1: D46.1 KEYS12.3 | length 46.6
  Bottom Layer w19.68: KEYS12.3@4391.08,4784.87 4392.27,4786.11 D46.1@4392.27,4831
D47_1: D47.1 KEYS12.2 | length 46.7
  Bottom Layer w19.68: KEYS12.2@4291.08,4784.87 4293.27,4787.11 D47.1@4293.3,4830.7
D48_1: D48.1 KEYS12.1 | length 46.3
  Bottom Layer w19.68: KEYS12.1@4191.08,4784.87 4192.37,4786.21 D48.1@4192.39,4830.68
D61_1: D61.1 KEYS16.4
D62_1: D62.1 KEYS16.3
D63_1: D63.1 KEYS16.2
D64_1: D64.1 KEYS16.1
F1_1: F1.1 USB.1 | length 99.3
  Bottom Layer w39.37: F1.1@2275.78,2580.71 2275.77,2497.81 USB.1@2287.4,2486.22
F1_2: C4.1 C8.2 D69.2 F1.2 KEY1.1 PWR.2 | length 456
  Bottom Layer w39.37: D69.2@2391.77,2665.31 2391.77,2582.91 F1.2@2389.57,2580.71 2464.37,2505.91 C8.2@2639.76,2505.91 ; KEY1.1@2525.57,2515.31 C4.1@2525.59,2604.62
  other v1: 2411.42,2549.21
FLG_1: FLG.1 R36.2
  other v1: 3147.63,3053.14
FLGCK: FLG.2 IC8.18 IC17.3 IC17.11 | length 2469.3
  Top Layer w10: v1(2643.7,4391.72) v1(3147.63,4391.72)
  Bottom Layer w10: IC17.3@2544.49,4230.31 2544.47,4272.81 2643.67,4372.01 v1(2643.7,4391.72) 2643.67,4447.21 2644.97,4448.51 IC17.11@2644.49,4530.31 ; v1@3147.67,4391.71 3147.97,4203.11 3129.87,4184.91 3129.87,3161.51 3151.57,3139.71 3175.17,3139.71 3216.57,3098.41 IC8.18@3216.57,2825.21
  other v1: 3151.57,3139.76
GND: ACC0.1 ACC1.1 ACC2.1 ACC3.1 C1.2 C2.1 C3.1 C4.2 C5.2 C6.2 C7.2 CLOCK.3 CLOCK.4 D69.1 IC1.8 IC2.4 IC2.5 IC2.8 IC3.8 IC4.7 IC5.7 IC6.7 IC6.8 IC6.9 IC6.10 IC7.8 IC7.15 IC8.10 IC9.8 IC11.7 IC12.7 IC12.8 IC12.10 IC13.7 IC13.8 IC13.10 IC14.2 IC14.8 IC15.1 IC15.8 IC15.15 IC16.1 IC16.8 IC16.15 IC17.7 IC18.7 IC18.8 IC19.7 R6.2 R7.2 R10.2 R12.1 R13.2 R22.1 R23.1 R24.1 R25.1 R26.2 R36.1 R40.1 R41.1 ROM0.1 ROM1.1 ROM2.1 ROM3.1 RST.3 RST.4 USB.2 | length 1919.6
  Top Layer w10: v3(2998.03,4029.52) v3(3045.27,4076.76)
  Top Layer w20: v1(2293.3,5183.06) v1(2942.91,5183.06)
  Bottom Layer w10: 2490.17,4779.51 2490.17,4763.81 2505.87,4748.01 R26.2@2505.87,4395.71 ; v2(2903.54,2966.53) v2(2903.54,3025.59) 2901.57,3025.61 2901.57,3189.01 2944.87,3232.31 2944.87,3282.31 IC14.8@2946.06,3283.46 ; v2(3078.47,3289.71) 3084.67,3283.51 3084.67,2998.01 3108.27,2974.41 3145.07,2974.41 R36.1@3147.67,2971.81 ; IC15.15@3318.5,4053.93 3318.47,4155.11 v3@3322.87,4159.41
  other v1: 2545.27,2706.69 2375.98,2812.99 3147.63,2971.8 3919.29,2971.8 2509.84,5183.06 2726.37,5183.06
  other v2: 5332.67,2102.36 5535.43,2102.36 5905.5,2181.1 2340.55,2257.87 2387.79,2259.84 3277.55,2275.59 4350.39,2275.59 3659.44,2277.56 5765.74,2287.4 5765.74,2340.55 4214.56,2423.22 4486.21,2423.22 4722.43,2425.19 2921.26,2437 5907.47,2438.97 5007.87,2476.37 2151.57,2480.31 4734.25,2513.78 4112.2,2525.59 4098.42,2586.61 4879.91,2598.42 2885.82,2614.17 2799.21,2643.7 3946.85,2661.41 5875.98,2661.41 2125.98,2736.22 2161.42,2736.22 2125.98,2789.37 2161.42,2789.37 4899.6,2883.85 4007.87,2901.57 5875.98,2931.1 2801.18,2972.44 4909.44,3049.21 4005.9,3084.64 2649.6,3137.79 4003.93,3309.05 4911.41,3324.8 5874.01,3346.45 5082.67,3496.06 4017.71,3553.14 5966.53,3566.92 4935.03,3578.73 4194.88,3580.7 4753.93,3582.67 5740.15,3602.36 2397.64,3669.28 4962.59,3746.06 4015.74,3751.96 5919.28,3757.87 5923.22,3874.01 3948.81,3885.82 4964.56,3937 2248.03,3954.72 2364.17,3970.47 4249.99,4029.52 4005.9,4041.33 5889.76,4076.76 2151.57,4094.48 4003.93,4094.48 4263.77,4098.42 5903.53,4114.17 5639.76,4145.66 5759.83,4145.66 5362.2,4153.54 4005.9,4155.5 4755.9,4157.47 5505.9,4157.47 3039.37,4230.31 4976.37,4230.31 3039.37,4297.24 3665.35,4334.64 3846.45,4334.64 3665.35,4444.87 3029.52,4564.95 3033.46,4692.9 3905.51,4708.65 3066.93,4944.87 3066.93,4999.99 2312.99,5100.38 2580.71,5100.38 4009.84,5116.13 3084.64,5210.62 2116.14,5267.71 3687.99,5316.92 2118.11,5358.26 3687.99,5397.3 3687.99,5477.68 3687.99,5558.06 3687.99,5638.44 3687.99,5718.82 3072.83,5744.08 3687.99,5799.2 2578.74,5954.71 2639.76,5954.71
  other v3: 5257.87,4131.88 3322.83,4159.44
H1_1: H1.1 IC19.6 R11.2 | length 508.3
  Bottom Layer w19.68: H1.1@5458.65,2205.12 5504.37,2205.11 5572.87,2273.61 5572.87,2383.81 5639.77,2450.81 R11.2@5671.25,2450.79 5663.37,2458.61 IC19.6@5663.38,2576.77
H1_2: H1.2 IC4.1 IC19.11 | length 2057.4
  Top Layer w10: v1@4210.67,2687.01 4655.47,2687.01 4671.27,2671.21 5501.97,2671.21 v1(5513.77,2683.07)
  Bottom Layer w10: IC4.1@4190.97,2580.71 4210.67,2600.41 v1@4210.67,2687.01 ; H1.2@5458.65,2305.12 5529.47,2376.01 5529.47,2490.11 5513.77,2505.81 v1(5513.77,2683.07) ; IC19.11@5463.38,2876.77 5463.37,2733.51 v1(5513.77,2683.07)
  other v1: 4210.62,2687
H1_3: H1.3 IC19.12 | length 511.2
  Bottom Layer w10: IC19.12@5363.38,2876.77 5415.37,2824.81 5415.37,2448.41 H1.3@5458.65,2405.12
IC1_1: IC1.1 IC2.1 IC3.14 | length 674
  Bottom Layer w10: IC1.1@5155.51,3931.1 5155.47,3881.91 5194.87,3842.51 5194.87,3665.31 5155.47,3626.01 IC2.1@5155.51,3491.28 5155.47,3439.01 IC3.14@5261.02,3333.46
IC1_2: IC1.2 IC2.2 IC3.13 | length 674.3
  Bottom Layer w10: IC1.2@5255.51,3931.1 5255.47,3882.31 5295.27,3842.51 5295.27,3665.31 5255.47,3625.51 IC2.2@5255.51,3491.28 5255.47,3439.01 IC3.13@5361.02,3333.46
IC1_3: IC1.3 IC2.3 IC3.12 | length 674.6
  Bottom Layer w10: IC1.3@5355.5,3931.1 5355.47,3865.01 5395.67,3824.81 5395.67,3659.41 5355.47,3619.21 IC2.3@5355.5,3491.28 5355.47,3457.51 5460.97,3351.91 IC3.12@5461.02,3333.46
IC1_4: IC1.4 IC1.5 IC2.6 IC3.11 | length 778.1
  Top Layer w19.68: IC1.4@5455.5,3931.1 IC1.5@5555.5,3931.1
  Bottom Layer w10: IC1.5@5555.5,3931.1 5555.47,3881.51 5596.47,3840.51 5596.47,3612.21 5655.47,3553.11 IC2.6@5655.5,3491.28 5655.47,3458.71 5560.97,3364.21 IC3.11@5561.02,3333.46
IC4_3: IC4.3 IC4.4 IC4.5 | length 200
  Top Layer w19.68: IC4.3@4390.97,2580.71 IC4.5@4590.97,2580.71
IC4_9: IC4.9 IC4.10 IC4.11 | length 200
  Top Layer w19.68: IC4.11@4490.97,2880.71 IC4.9@4690.97,2880.71
IC5_3: IC5.3 IC19.10 | length 1559.1
  Top Layer w10: v1(4431.1,2726.37) 4446.84,2726.37 ; 4446.84,2726.38 4954.72,2726.38 4958.65,2722.44 5466.53,2722.44 v1@5490.15,2746.06
  Bottom Layer w10: IC5.3@4390.97,3037.41 4390.97,2979.11 4431.07,2939.01 v1(4431.1,2726.37) ; v1(5490.15,2746.06) 5563.37,2819.31 IC19.10@5563.38,2876.77
IC5_5: IC4.2 IC5.5 | length 707.8
  Top Layer w10: v1(4309.05,2655.51) v1(4525.58,2655.51)
  Bottom Layer w10: IC4.2@4290.97,2580.71 4290.97,2637.41 v1@4309.07,2655.51 ; v1(4525.58,2655.51) 4545.27,2675.21 4545.27,2939.01 4590.97,2984.71 IC5.5@4590.97,3037.41
IC5_8: IC4.13 IC5.8 IC7.1 | length 1345.8
  Top Layer w10: v1(4230.31,3208.66) 4791.33,3208.66 v1(4793.3,3210.62)
  Bottom Layer w10: IC7.1@4190.97,3490.11 4190.97,3437.01 4230.27,3397.61 v1(4230.31,3208.66) 4236.17,3208.71 4236.17,2988.21 4290.97,2933.41 IC4.13@4290.97,2880.71 ; IC5.8@4790.97,3337.41 4793.27,3335.01 v1(4793.3,3210.62)
IC9_2: IC9.2 IC11.3 | length 1252.6
  Top Layer w10: v1(2344.49,4785.42) v1(3419.27,4785.41)
  Bottom Layer w10: v1(2344.49,4785.42) 2344.47,4696.41 IC9.2@2346.06,4694.88 ; IC11.3@3418.5,4698.81 v1(3419.27,4785.41)
IC9_6: IC9.6 IC11.6 | length 1095.5
  Top Layer w10: v1(2753.93,4757.87) 3714.53,4757.87 v1(3718.47,4761.81)
  Bottom Layer w10: IC9.6@2746.06,4694.88 2753.97,4702.71 v1@2753.97,4757.91 ; IC11.6@3718.5,4698.81 v1(3718.47,4761.81)
IC9_12: IC9.12 IC11.8 | length 1405.9
  Top Layer w10: v1(2694.88,4864.16) v1(3812.99,4864.16)
  Bottom Layer w10: IC9.12@2646.06,4994.88 2646.07,4913.01 v1(2694.88,4864.16) ; v1(3812.99,4864.16) 3812.97,4993.31 IC11.8@3818.5,4998.81
IC9_15: IC9.15 IC11.11 | length 1384.5
  Top Layer w10: v1(2344.49,4891.72) v1(3517.71,4891.72)
  Bottom Layer w10: v1(2344.49,4891.72) 2344.47,4993.31 IC9.15@2346.06,4994.88 ; v1(3517.71,4891.72) 3517.67,4998.01 IC11.11@3518.5,4998.81
IC12_3: IC12.3 IC15.7 | length 860.9
  Top Layer w10: v1(3452.75,3862.2) 3454.72,3864.17 v1(3809.05,3864.17)
  Bottom Layer w10: IC12.3@3418.5,4226.37 3418.47,4177.91 3460.67,4135.81 3460.67,3862.21 v1(3452.75,3862.2) ; v1@3809.07,3864.21 3809.07,3763.41 IC15.7@3818.5,3753.93
IC12_4: IC12.4 IC15.9 | length 568.7
  Top Layer w10: v1(3527.55,4133.85) 3907.47,4133.85 v1(3911.41,4137.79)
  Bottom Layer w10: IC12.4@3518.5,4226.37 3518.47,4142.91 v1@3527.57,4133.81 ; v1(3911.41,4137.79) 3918.47,4130.71 IC15.9@3918.5,4053.93
IC12_5: IC12.5 IC16.7 | length 1221.6
  Top Layer w10: v1@2846.47,3887.81 3576.77,3887.81 v1(3576.77,3891.73)
  Bottom Layer w10: IC16.7@2846.06,3753.93 2846.47,3754.31 v1@2846.47,3887.81 ; v1(3576.77,3891.73) 3576.77,4108.31 3620.07,4151.61 3620.07,4224.81 IC12.5@3618.5,4226.37
  other v1: 2846.45,3887.79
IC12_6: IC12.6 IC16.9 | length 904.1
  Top Layer w10: IC16.9@2946.06,4053.93 2946.07,4079.91 2974.37,4108.31 v1(3677.16,4108.26)
  Bottom Layer w10: v1(3677.16,4108.26) 3718.47,4149.61 IC12.6@3718.5,4226.37
IC13_11: IC13.11 IC14.13 | length 1308.4
  Top Layer w10: v1(2545.27,3517.71) v1(3722.44,3517.71)
  Bottom Layer w10: v1(2545.27,3517.71) IC14.13@2546.06,3583.46 ; IC13.11@3718.5,3581.49 3722.47,3577.51 v1@3722.47,3517.71
IC13_12: IC13.12 IC14.14 | length 1414
  Top Layer w10: v1@2446.87,3462.61 3620.07,3462.61 v1(3620.07,3466.53)
  Bottom Layer w10: IC14.14@2446.06,3583.46 2446.87,3582.71 v1@2446.87,3462.61 ; IC13.12@3618.5,3581.49 3618.47,3468.11 v1(3620.07,3466.53)
  other v1: 2446.85,3462.59
IC13_13: IC13.13 IC14.15 | length 1360.9
  Top Layer w10: v1(2348.42,3486.21) 2352.36,3490.15 v1(3517.71,3490.15)
  Bottom Layer w10: IC14.15@2346.06,3583.46 2348.47,3581.11 v1@2348.47,3486.21 ; v1@3517.67,3490.11 3517.67,3580.71 IC13.13@3518.5,3581.49
IC13_14: IC13.14 IC14.1 | length 1464.6
  Top Layer w10: v1(2250,3391.73) 2257.87,3399.6 v1(3419.29,3399.6)
  Bottom Layer w10: IC14.1@2246.06,3283.46 2249.97,3287.41 v1(2250,3391.73) ; IC13.14@3418.5,3581.49 3419.27,3580.71 v1(3419.29,3399.6)
IC17_2: D65.2 D66.2 D67.2 D68.2 IC17.2 R26.1 | length 1285.3
  Top Layer w10: v1(2277.56,4840.54) 2276.58,4840.54 2275.1,4839.07 v1(2461.12,4839.07) 2645.18,4839.07 v1(2647.64,4836.61) 2651.58,4832.67 v1(2824.8,4832.67)
  Bottom Layer w10: D66.2@2250,4870.07 2249.97,4868.11 v1(2277.56,4840.54) ; IC17.2@2444.49,4230.31 2444.47,4395.71 2430.47,4395.71 2442.87,4408.11 2442.87,4431.11 2486.17,4474.41 2486.17,4734.21 2461.17,4759.31 D67.2@2461.17,4839.11 ; v1(2824.8,4832.67) 2846.47,4811.01 D68.2@2848.47,4811.01